# Altium PCB PCB1.PcbDoc
Units mm, origin at the board's own origin, x right, y up, seen from the top; angles counter-clockwise.
Board outline 25.25 x 9.75 mm, 2 copper layers (Top Layer, Bottom Layer); 5 components, 3 nets, 17 pads, 5 vias.
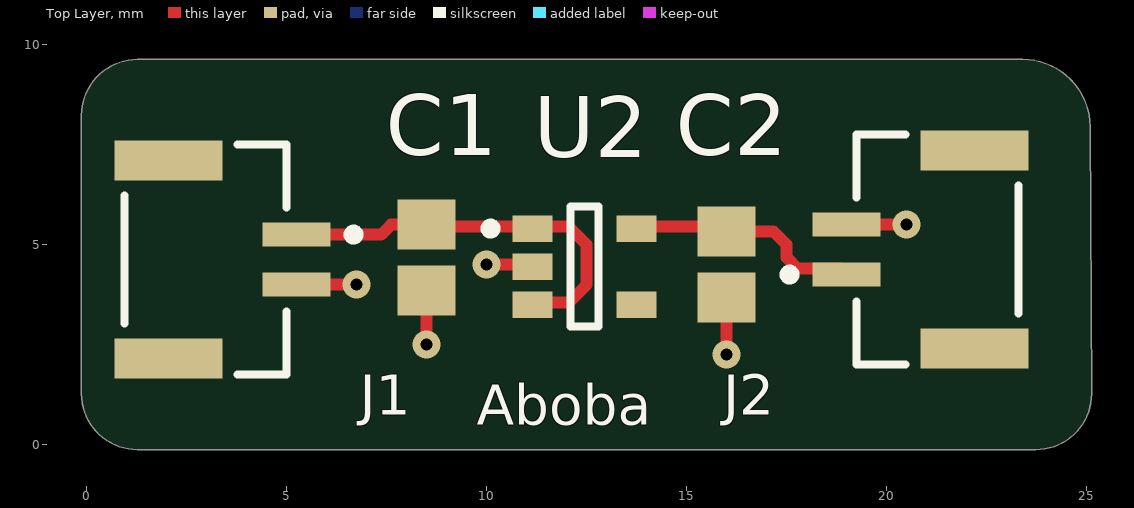
[diagram p0: Top Layer view]
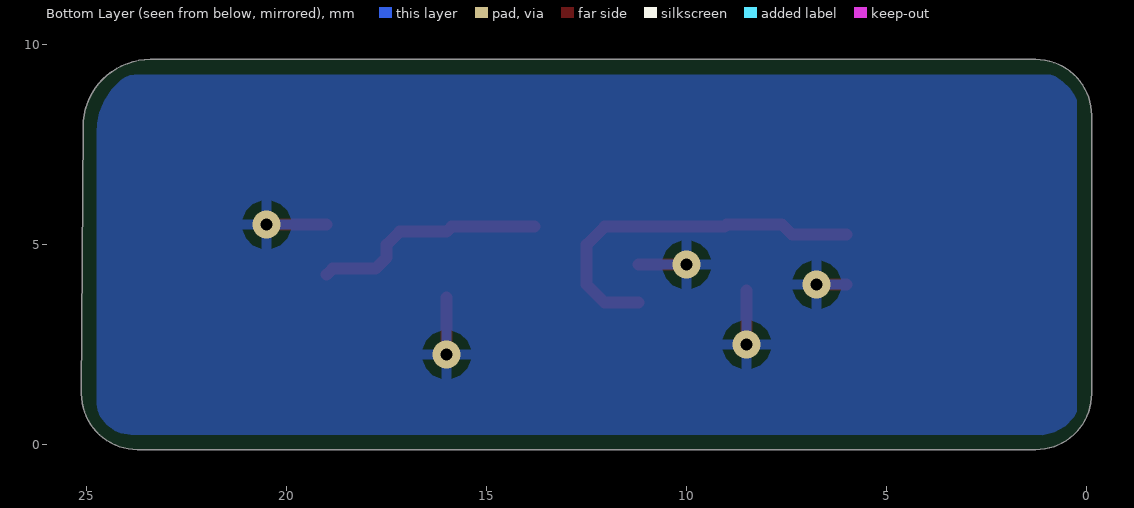
[diagram p1: Bottom Layer view, seen from below]
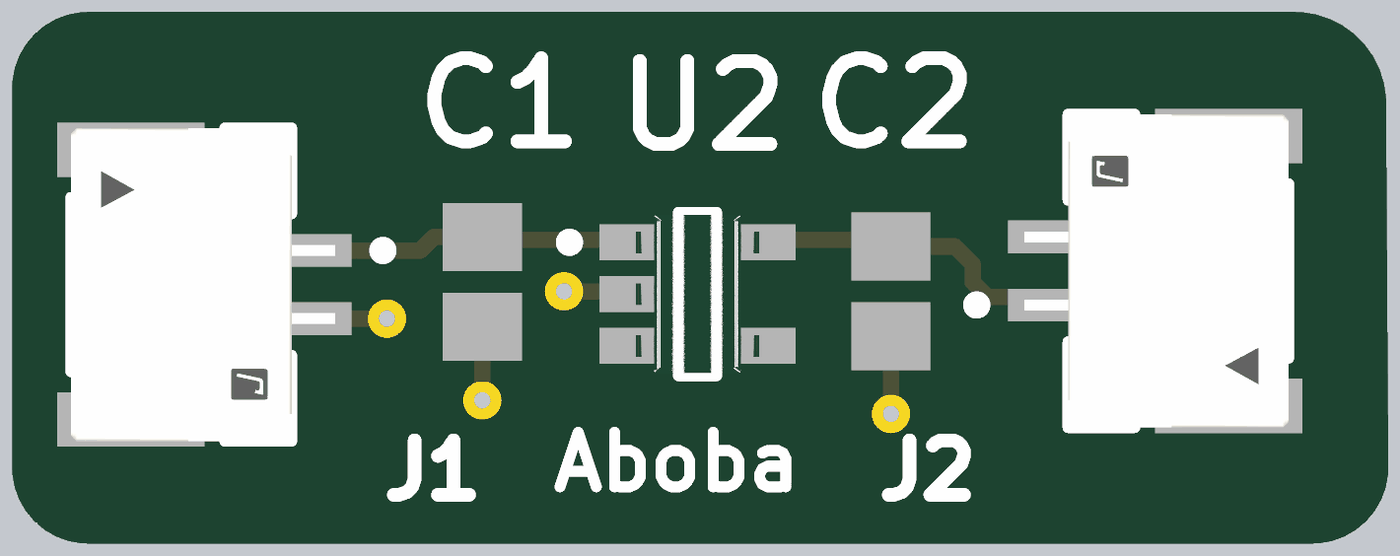
[diagram p2: 3D render of the assembled board from above, using the file's embedded part models]

## Layer stack, top to bottom
Top Solder: solder mask 0.0102, Solder Resist, Dk 3.5
Top Layer: signal copper 0.0356
Dielectric 1: dielectric 0.32, FR-4, Dk 4.8
Bottom Layer: signal copper 0.0356
Bottom Solder: solder mask 0.0102, Solder Resist, Dk 3.5

## Board outline
-0.127,1.27 ccw(c1.27,1.27) 1.27,-0.127 23.73,-0.127 ccw(c23.73,1.27) 25.127,1.27 25.127,1.271 25.087,7.945 ccw(c23.404,7.944) 23.404,9.627 1.27,9.627 ccw(c1.27,8.23) -0.127,8.23

## Design rules (kind name [scope] priority, off if disabled: settings)
Clearance [All] p1: gap=0.254 ignorepadtopadclearanceinfootprint=FALSE
PolygonConnect [All] p1: connectstyle=Relief reliefconductorwidth=0.254 reliefentries=4 polygonreliefangle="90 Angle" airgapwidth=0.254
RoutingVias [All] p1: holewidth=0.711 width=1.27 viastyle="Through Hole" minholewidth=0.711 minwidth=1.27 maxholewidth=0.711 maxwidth=1.27
SolderMaskExpansion [All] p1: expansion=0 istentingtop=FALSE
SupplyNets "Schematic Supply Nets_2" [InNet('+5V')] p1: voltage=0.000
SupplyNets "Schematic Supply Nets_1" [InNet('GND')] p2: voltage=0.000
SupplyNets "Schematic Supply Nets" [InNet('+3.3V')] p3: voltage=0.000
Width [All] p1: maxlimit=0.5 minlimit=0.254 preferedwidth=0.3
30 further rules are at their usual default settings.

## Components (designator, comment, footprint, x,y, rotation, side; value= is the part's Value field where it differs from the comment)
C1 "1uF" CAPC2013X145X50NL20T20 8.5,4.675 r270 top
C2 "1uF" CAPC2013X145X50NL20T20 16,4.5 r270 top
J1 "SM02B-GHS-TB(LF)(SN)" FP-SM02B-GHS-TB_LF_SN-MFG 2.975,4.625 r270 top
J2 "SM02B-GHS-TB(LF)(SN)" FP-SM02B-GHS-TB_LF_SN-MFG 21.275,4.875 r90 top
U2 "MIC5317-3.3YM5-TR" FP-SOT23-5LD-PL-1-MFG 12.45,4.45 r0 top

## Footprints (in the part's own frame and the unit in brackets; to place one, negate y for a bottom-side part, rotate by r counter-clockwise, add the part's x,y. Pads: shape width x height; smd on the part's side, far side on the other; paste and mask are expansions set on the pad)
CAPC2013X145X50NL20T20 [mm] "Chip Capacitor, 2-Leads, Body 2.00x1.25mm, IPC Medium Density"
  rect 1.25x1.45 smd: 1(-0.825,0) 2(0.825,0)
  body extent -1.1,-0.72 1.1,0.72, height 1.45
FP-SM02B-GHS-TB_LF_SN-MFG [mm]
  rect 0.6x1.7 smd paste+0 mask+0: 1(-0.625,2.275) 2(0.625,2.275)
  rect 1x2.7 smd paste+0 mask+0: 3(-2.475,-0.925) 4(2.475,-0.925)
  silkscreen extent -2.88,-2.02 2.88,3.83, body extent -3.08,-2.37 3.08,3.22, height 0.25
FP-SOT23-5LD-PL-1-MFG [mm]
  rect 1x0.66 smd paste+0 mask+0: 1(-1.3,0.95) 2(-1.3,0) 3(-1.3,-0.95) 4(1.3,-0.95) 5(1.3,0.95)
  silkscreen extent -2.47,-1.5 0.35,1.5, body extent -1.9,-1.6 1.9,1.6, height 0.25

## Part data
C1 C2: library part CMP-2007-01676-1, Manufacturer=Vitramon, Part Number=VJ0805Y105KXQRW1BC
J1 J2: library part CMP-2000-07076-2, "CONN HEADER SMD R/A 2POS 1.25MM", Color=Natural, Current Rating=1A, Package Quantity=2500, Voltage Rating=50V, Connector Type="Outer Shroud Contact", Contact Material=Bronze, Contact Plating=Tin, Contact Type="Male Pin", Fastening Type=Latch, Housing Color=Natural, Housing Material=Nylon, Lead Free="Lead Free", Mount="Surface Mount", Number of Contacts=2, Number of Positions=2, Number of Rows=1, Orientation="Right Angle", Packaging="Tape and Reel", Pitch=0.049inch, Series=GH, Termination=Solder
U2: library part CMP-06324-000116-1, "IC REG LINEAR 3.3V 150MA SOT23-5", Case/Package=SOT-23-5, Dropout Voltage=155mV, Max Input Voltage=6V, Max Operating Temperature=125°C, Min Current Limit=200mA, Min Input Voltage=2.5V, Min Operating Temperature=-40°C, Output Current=150mA, Output Voltage=3.3V, Package Quantity=3000, Power Supply Rejection Ratio (PSRR)=70dB, Mount="Surface Mount", Number of Outputs=1, Number of Regulators=1, Packaging="Tape and Reel", RoHS Compliant=No, Series=-

## Via types
v1: diameter 0.7, hole 0.3, Top Layer to Bottom Layer, 5 vias

## Nets (pads, with @x,y where several pads share a name; then routed paths per layer and width w, separated by ;. In a path a pad name is that pad's centre, name@x,y a point inside that pad or via, vN(x,y) a via of type N, cw(c..) or ccw(c..) an arc to the next point about the centre after c; other vN are vias at no path point)
+3.3V: C2.1 J2.1 U2.5 | length 5.9
  Top Layer w0.3: U2.5@13.8,5.45 15.875,5.45 C2.1 17.175,5.325 17.5,5 17.5,4.676 17.776,4.4 18.85,4.4 J2.1
+5V: C1.1 J1.1 U2.1 U2.3 | length 9.3
  Top Layer w0.3: J1.1@6,5.25 7.363,5.25 7.613,5.5 9,5.5 9.05,5.45 11.2,5.45 12.05,5.45 12.5,5 12.5,4 12.05,3.55 U2.3@11.2,3.55
GND: C1.2 C2.2 J1.2 J2.2 U2.2 | length 6.2
  Top Layer w0.3: J1.2@6,4 v1(6.75,4) ; v1(8.5,2.5) C1.2 ; v1(10,4.5) U2.2@11.2,4.5 ; v1(16,2.25) C2.2 ; J2.2 v1(20.5,5.5)
pads on no net: J1.3 J1.4 J2.3 J2.4 U2.4

## Polygon pours and split planes (outlines as drawn)
GND on Bottom Layer " " (solid, pour order 0): 0.25,8.607 cw(c1.347,8.153) 0.893,9.25 23.75,9.25 cw(c23.75,8.647) 24.177,9.073 24.25,9 cw(c23.043,7.793) 24.75,7.793 24.75,1.104 cw(c23.897,1.103) 24.5,0.5 cw(c23.897,1.103) 23.896,0.25 1.27,0.25 cw(c1.187,1.295) 0.25,0.824

## Silkscreen, mask and mechanical layers (free items; w line width, h text height)
Top Overlay:
  text "Aboba" at 9.75,0.5 h1
Mechanical 1:
  lines w0.254: 2,0 23.73,0 ccw(c23.73,1.27) 25,1.27 24.96,7.944 ccw(c23.404,7.944) 23.404,9.5 1.27,9.5 ccw(c1.27,8.23) 0,8.23 0,1.27 ccw(c1.27,1.27) 1.27,0 11.73,0